# Altium PCB motor_dev_pcb.PcbDoc (part 1 of 2)
Units mm, origin at the board's own origin, x right, y up, seen from the top; angles counter-clockwise.
Board outline 133.34 x 70 mm, 2 copper layers (Top Layer, Bottom Layer); 214 components, 218 nets, 1073 pads, 147 vias.
Unrouted connection lines stored in the file: 690.
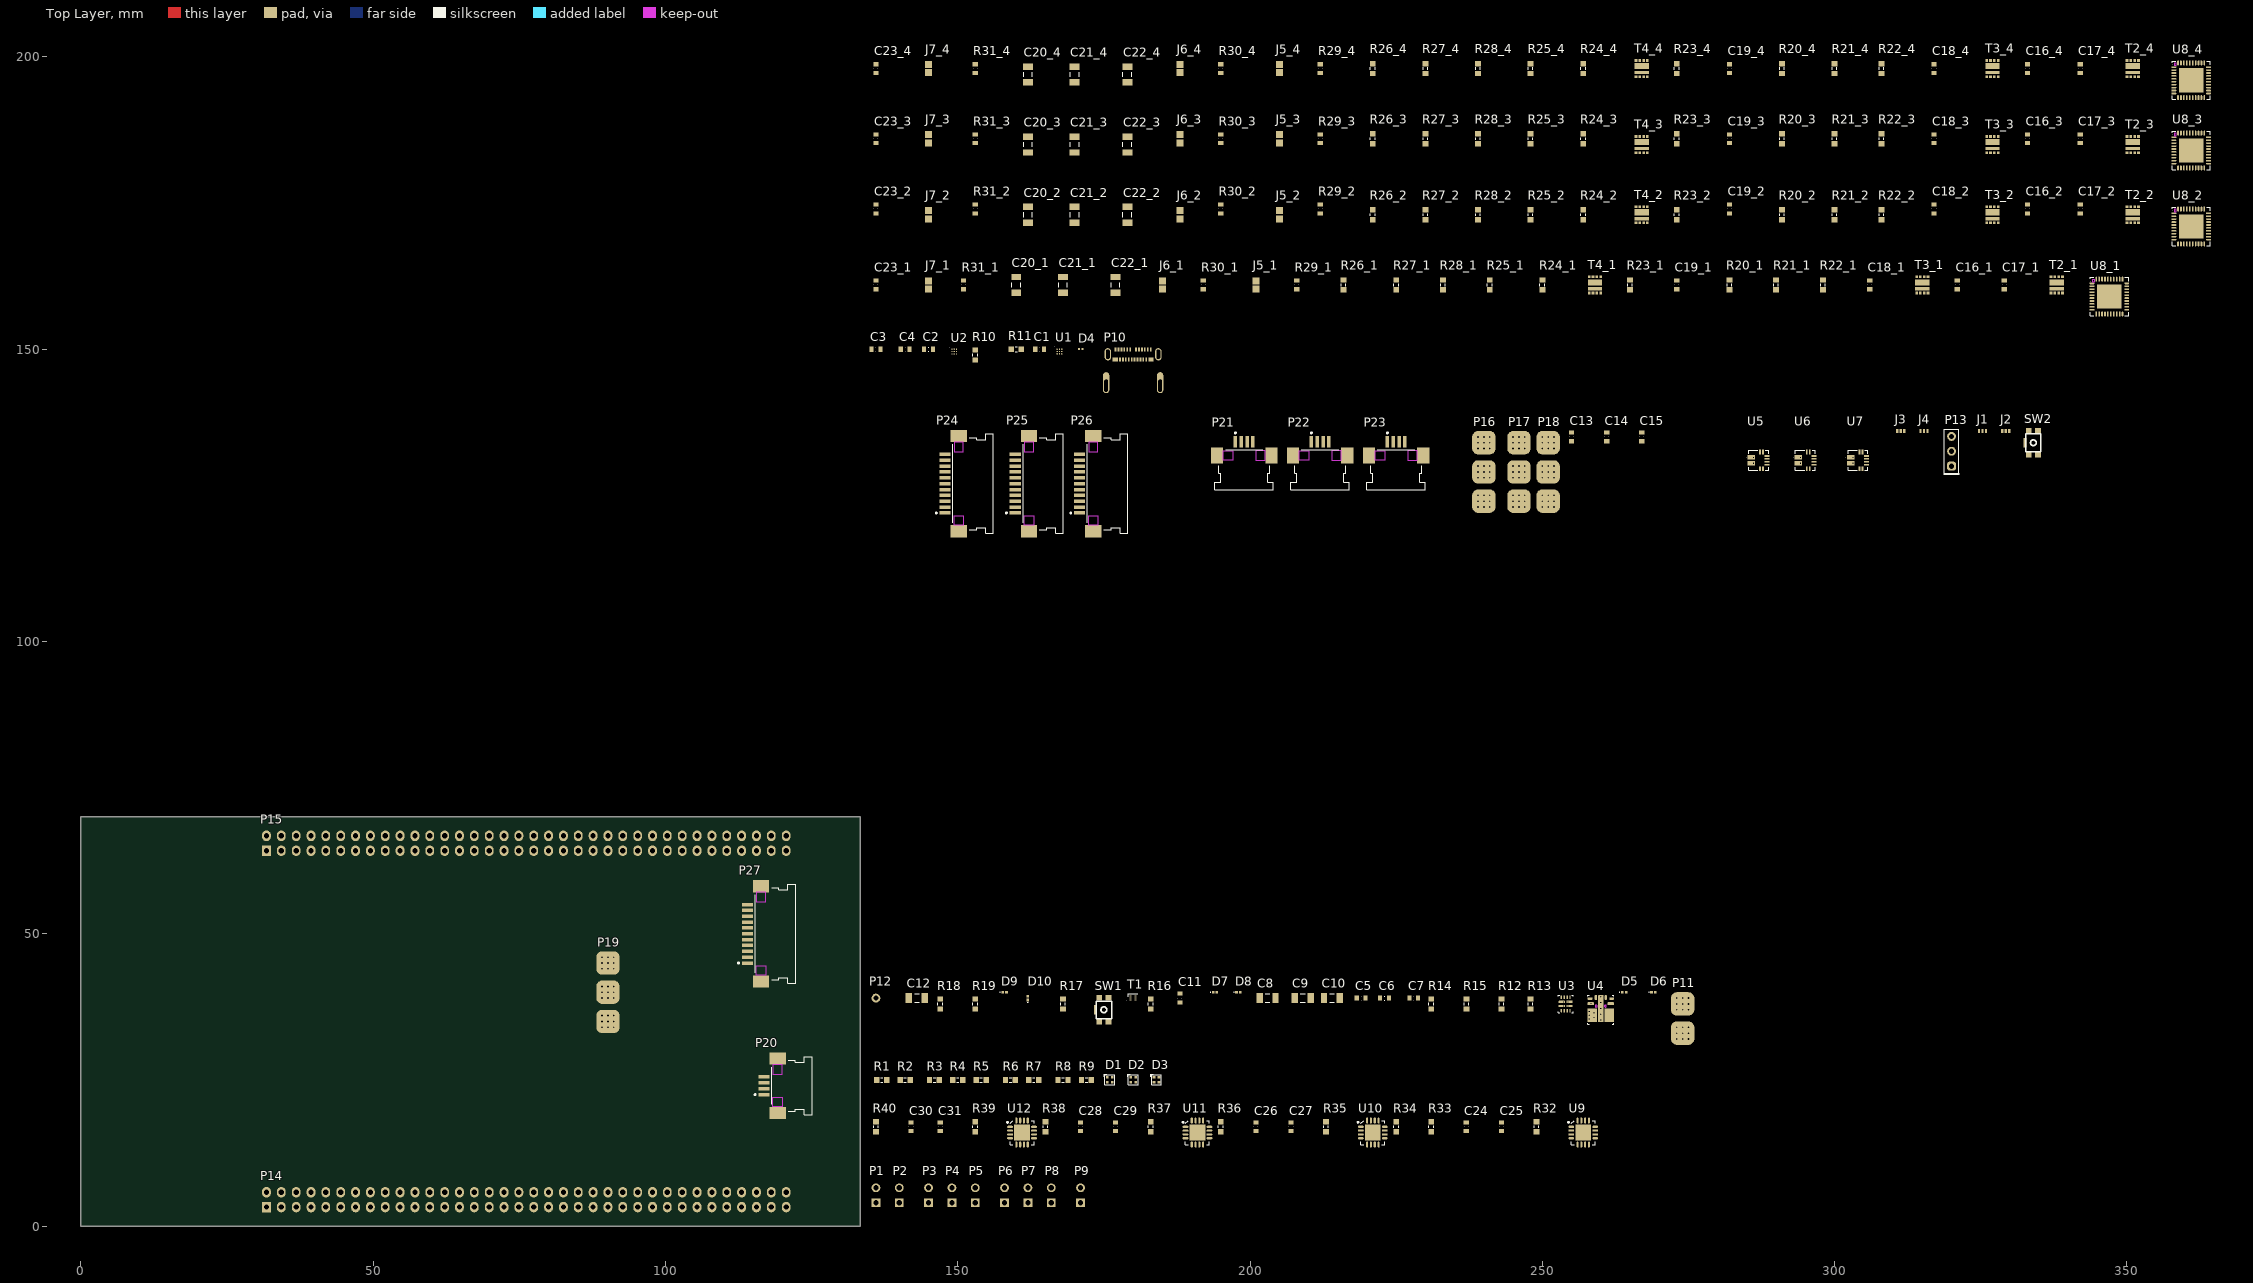
[diagram p0: Top Layer view]
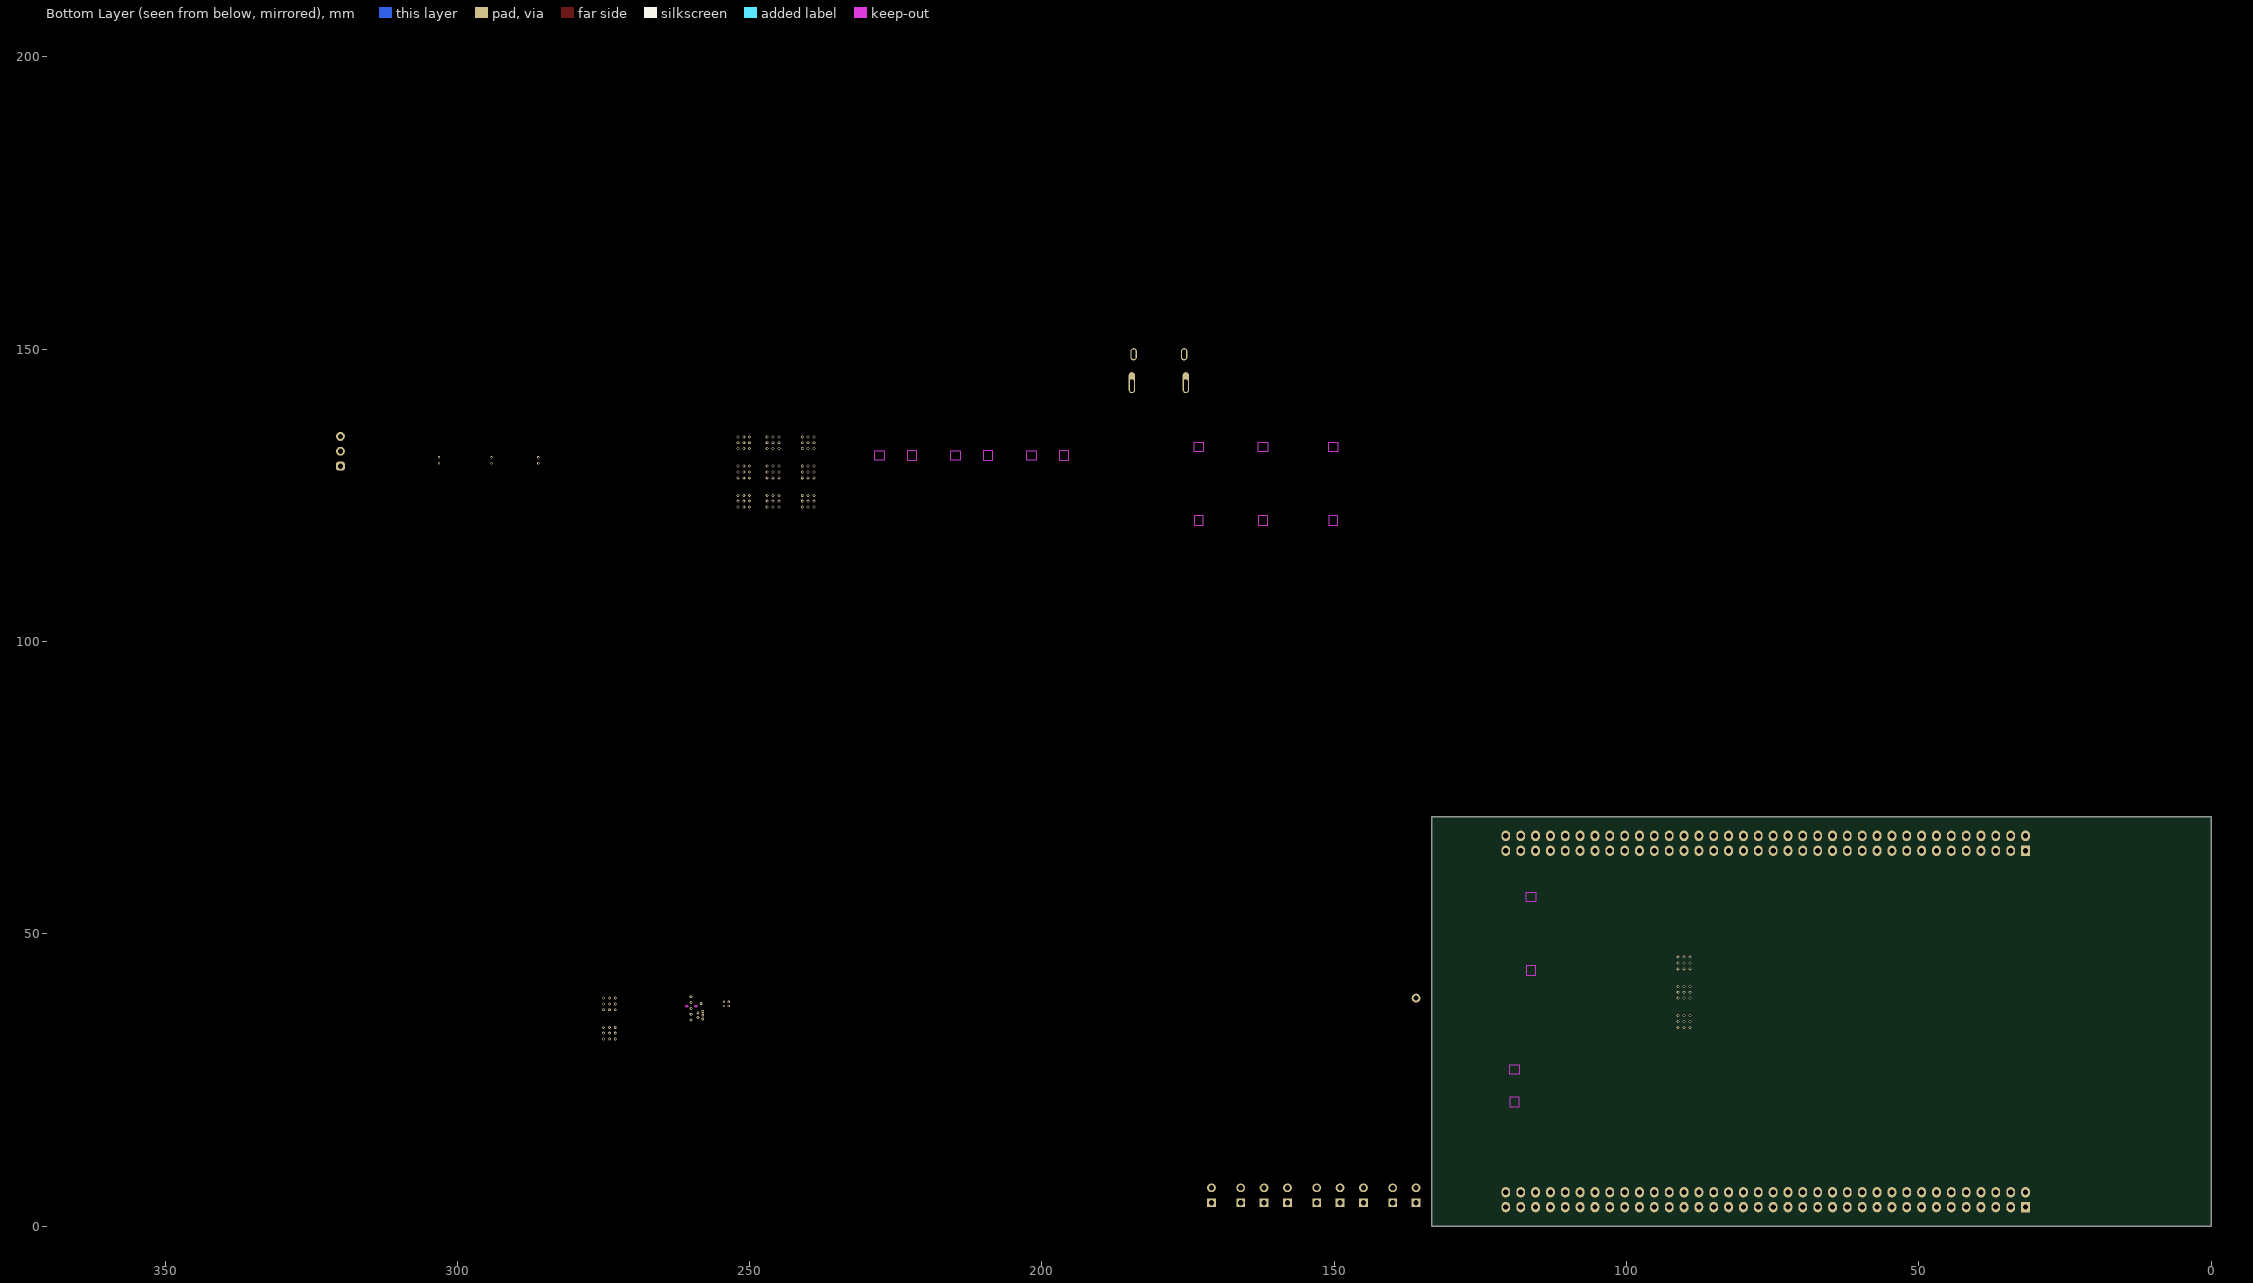
[diagram p1: Bottom Layer view, seen from below]

## Layer stack, top to bottom
Top Solder: solder mask 0.0102, Solder Resist, Dk 3.5
Top Layer: signal copper 0.0356
Dielectric1: dielectric 0.32, FR-4, Dk 4.8
Bottom Layer: signal copper 0.0356
Bottom Solder: solder mask 0.0102, Solder Resist, Dk 3.5

## Board outline
0,0 133.34,0 133.34,70 0,70

## Design rules (kind name [scope] priority, off if disabled: settings)
AcuteAngle [All] p1 off: minimum=8.80000000000000E+0001 checktracksonly=FALSE
BoardOutlineClearance [All] p1: gap=0.5 ignorepadtopadclearanceinfootprint=FALSE
Clearance Clearance_Normal [All] p1: gap=0.1 ignorepadtopadclearanceinfootprint=FALSE except(0.2: Via-Via Via-Fill Via-Poly Via-Region Via-Text Via-Hole)
ComponentClearance [All] p1: gap=0.2 collisioncheckmode=3 verticalgap=0.2 showdistances=FALSE
FabricationTestPointUsage TestPointUsage [All] p1: valid=0 allowmultiple=FALSE
FabricationTestpoint Testpoint [All] p1: side=3 testpointundercomponent=TRUE minsize=1.016 maxsize=2.54 preferedsize=1.524 minholesize=0 maxholesize=1.016 preferedholesize=0.813 testpointgrid=0.025 allowsidetop=TRUE allowsidebottom=TRUE usegrid=TRUE gridtolerance=0
Height [All] p1 off: minheight=0 maxheight=25.4 prefheight=12.7
HoleSize [All] p1: absolutevalues=TRUE maxlimit=0.4 minlimit=0.2 maxpercent=80.000 minpercent=20.000
HoleToHoleClearance [All] p1: gap=0.2 allowstackedmicrovias=TRUE
MinimumAnnularRing MinimumAnnularRingOuterLayer [OnLayer('Top Layer') Or OnLayer('Bottom Layer')] p1: minimumring=0.1
MinimumAnnularRing MinimumAnnularRingInnerLayer [(Not OnLayer('Top Layer')) Or (Not OnLayer('Bottom Layer'))] p2: minimumring=0.1
MinimumSolderMaskSliver [All] p1: minsoldermaskwidth=0.15
PlaneClearance [All] p1: clearance=0.4
PlaneConnect [All] p1: planeconnectstyle=Relief reliefexpansion=0.508 reliefentries=4 reliefconductorwidth=0.2 reliefairgap=0.254
PolygonConnect PolygonConnect_Via [IsVia] p1: connectstyle=Direct reliefconductorwidth=0.254 reliefentries=4 polygonreliefangle="90 Angle" airgapwidth=0.254
PolygonConnect [All] p2: connectstyle=Relief reliefconductorwidth=0.2 reliefentries=4 polygonreliefangle="90 Angle" airgapwidth=0.254
RoomDefinition U_USB [InComponentClass('U_USB')] p1 off: confinementstyle=ConfineIn formatcopy=TRUE lockcomponents=FALSE outline 134,141 186,141 186,154 134,154
RoomDefinition U_Programmer [InComponentClass('U_Programmer')] p2 off: confinementstyle=ConfineIn formatcopy=TRUE lockcomponents=FALSE outline 134,44 337,44 337,140 134,140
RoomDefinition U_Power [InComponentClass('U_Power')] p3 off: confinementstyle=ConfineIn formatcopy=TRUE lockcomponents=FALSE outline 134,30 277,30 277,44 134,44
RoomDefinition U_Leds [InComponentClass('U_Leds')] p4 off: confinementstyle=ConfineIn formatcopy=TRUE lockcomponents=FALSE outline 135,23 187,23 187,29 135,29
RoomDefinition U_Encoders [InComponentClass('U_Encoders')] p5 off: confinementstyle=ConfineIn formatcopy=TRUE lockcomponents=FALSE outline 135,13 260,13 260,22 135,22
RoomDefinition U4_ESC_2S-5S [InComponentClass('U4_ESC_2S-5S')] p6 off: confinementstyle=ConfineIn formatcopy=TRUE lockcomponents=FALSE outline 135,192 365,192 365,203 135,203
RoomDefinition U3_ESC_2S-5S [InComponentClass('U3_ESC_2S-5S')] p7 off: confinementstyle=ConfineIn formatcopy=TRUE lockcomponents=FALSE outline 135,180 365,180 365,191 135,191
RoomDefinition U2_ESC_2S-5S [InComponentClass('U2_ESC_2S-5S')] p8 off: confinementstyle=ConfineIn formatcopy=TRUE lockcomponents=FALSE outline 135,167 365,167 365,179 135,179
RoomDefinition U1_ESC_2S-5S [InComponentClass('U1_ESC_2S-5S')] p9 off: confinementstyle=ConfineIn formatcopy=TRUE lockcomponents=FALSE outline 135,155 351,155 351,166 135,166
RoutingCorners [All] p1: cornerstyle=45-Degree minsetback=1 maxsetback=2.54
RoutingVias [All] p1: holewidth=0.3 width=0.6 viastyle="Through Hole" minholewidth=0.2 minwidth=0.5 maxholewidth=1 maxwidth=4
SMDToCorner [All] p1 off: distance=78740
SMDToPlane [All] p1 off: distance=118110
SilkToSilkClearance [All] p1: silktosilkclearance=0.1
SilkToSolderMaskClearance SilkscreenOverComponentPads [IsPad] p1: minsilkscreentomaskgap=0.15 clearancetoexposedcopper=TRUE
SilkToSolderMaskClearance SilkscreenOverComponentPads_1 [IsPad] p2: minsilkscreentomaskgap=0.1 clearancetoexposedcopper=FALSE
SolderMaskExpansion [All] p1: expansion=0.075
ViasUnderSMD [All] p1: allowed=FALSE
Width [All] p1: maxlimit=5 minlimit=0.1 preferedwidth=0.2 minimp=50.000000 maximp=50.000000 favimp=50.000000
18 further rules are at their usual default settings.

## Classes and differential pairs
channel class ESC_2S-5S: U1_ESC_2S-5S U2_ESC_2S-5S U3_ESC_2S-5S U4_ESC_2S-5S
component class U_USB: C1 C2 C3 C4 D4 P10 R10 R11 U1 U2
component class U_Programmer: C13 C14 C15 J1 J2 J3 J4 P13 P14 P15 P16 P17 P18 P19 P20 P21 P22 P23 P24 P25 P26 P27 SW2 U5 U6 U7
component class U_Power: C5 C6 C7 C8 C9 C10 C11 C12 D5 D6 D7 D8 D9 D10 P11 P12 R12 R13 R14 R15 R16 R17 R18 R19 SW1 T1 U3 U4
component class U_Leds: D1 D2 D3 R1 R2 R3 R4 R5 R6 R7 R8 R9
component class U_Encoders: C24 C25 C26 C27 C28 C29 C30 C31 R32 R33 R34 R35 R36 R37 R38 R39 R40 U9 U10 U11 U12
component class U4_ESC_2S-5S: C16_4 C17_4 C18_4 C19_4 C20_4 C21_4 C22_4 C23_4 J5_4 J6_4 J7_4 R20_4 R21_4 R22_4 R23_4 R24_4 R25_4 R26_4 R27_4 R28_4 R29_4 R30_4 R31_4 T2_4 T3_4 T4_4 U8_4
component class U3_ESC_2S-5S: C16_3 C17_3 C18_3 C19_3 C20_3 C21_3 C22_3 C23_3 J5_3 J6_3 J7_3 R20_3 R21_3 R22_3 R23_3 R24_3 R25_3 R26_3 R27_3 R28_3 R29_3 R30_3 R31_3 T2_3 T3_3 T4_3 U8_3
component class U2_ESC_2S-5S: C16_2 C17_2 C18_2 C19_2 C20_2 C21_2 C22_2 C23_2 J5_2 J6_2 J7_2 R20_2 R21_2 R22_2 R23_2 R24_2 R25_2 R26_2 R27_2 R28_2 R29_2 R30_2 R31_2 T2_2 T3_2 T4_2 U8_2
component class U1_ESC_2S-5S: C16_1 C17_1 C18_1 C19_1 C20_1 C21_1 C22_1 C23_1 J5_1 J6_1 J7_1 R20_1 R21_1 R22_1 R23_1 R24_1 R25_1 R26_1 R27_1 R28_1 R29_1 R30_1 R31_1 T2_1 T3_1 T4_1 U8_1

## Components (designator, comment, footprint, x,y, rotation, side; value= is the part's Value field where it differs from the comment)
C1 "100nF 50V X7R" CAPC1608X08L 164,150 r0 top
C2 "100nF" CAPC1608X08L 145,150 r0 top
C3 "470pF" CAPC1608X08L 136,150 r0 top
C4 "470pF" CAPC1608X08L 141,150 r0 top
C5 "100pF" CAPC1608X08L 219,39 r0 top
C6 "47uF" CAPC1608X08L 223,39 r0 top
C7 "47uF" CAPC1608X08L 228,39 r0 top
C8 "22uF 35V" CAPC3216X17L 203,39 r0 top
C9 "22uF 35V" CAPC3216X17L 209,39 r0 top
C10 "22uF 35V" CAPC3216X17L 214,39 r0 top
C11 "100nF" CAPC1608X08L 188,39 r90 top
C12 "22uF 35V" CAPC3216X17L 143,39 r0 top
C13 "100nF" CAPC1608X08L 255,135 r90 top
C14 "100nF" CAPC1608X08L 261,135 r90 top
C15 "100nF" CAPC1608X08L 267,135 r90 top
C16_1 "100nF 35V X5R" CAPC1608X08L 321,161 r90 top (schematic designator C16)
C16_2 "100nF 35V X5R" CAPC1608X08L 333,174 r90 top (schematic designator C16)
C16_3 "100nF 35V X5R" CAPC1608X08L 333,186 r90 top (schematic designator C16)
C16_4 "100nF 35V X5R" CAPC1608X08L 333,198 r90 top (schematic designator C16)
C17_1 "1uF 16V X5R" CAPC1608X08L 329,161 r90 top (schematic designator C17)
C17_2 "1uF 16V X5R" CAPC1608X08L 342,174 r90 top (schematic designator C17)
C17_3 "1uF 16V X5R" CAPC1608X08L 342,186 r90 top (schematic designator C17)
C17_4 "1uF 16V X5R" CAPC1608X08L 342,198 r90 top (schematic designator C17)
C18_1 "47nF 35V X5R" CAPC1608X08L 306,161 r90 top (schematic designator C18)
C18_2 "47nF 35V X5R" CAPC1608X08L 317,174 r90 top (schematic designator C18)
C18_3 "47nF 35V X5R" CAPC1608X08L 317,186 r90 top (schematic designator C18)
C18_4 "47nF 35V X5R" CAPC1608X08L 317,198 r90 top (schematic designator C18)
C19_1 "1uF 6.3V X5R" CAPC1608X08L 273,161 r90 top (schematic designator C19)
C19_2 "1uF 6.3V X5R" CAPC1608X08L 282,174 r90 top (schematic designator C19)
C19_3 "1uF 6.3V X5R" CAPC1608X08L 282,186 r90 top (schematic designator C19)
C19_4 "1uF 6.3V X5R" CAPC1608X08L 282,198 r90 top (schematic designator C19)
C20_1 "22uF 35V" CAPC3216X17L 160,161 r90 top (schematic designator C20)
C20_2 "22uF 35V" CAPC3216X17L 162,173 r90 top (schematic designator C20)
C20_3 "22uF 35V" CAPC3216X17L 162,185 r90 top (schematic designator C20)
C20_4 "22uF 35V" CAPC3216X17L 162,197 r90 top (schematic designator C20)
C21_1 "22uF 35V" CAPC3216X17L 168,161 r90 top (schematic designator C21)
C21_2 "22uF 35V" CAPC3216X17L 170,173 r90 top (schematic designator C21)
C21_3 "22uF 35V" CAPC3216X17L 170,185 r90 top (schematic designator C21)
C21_4 "22uF 35V" CAPC3216X17L 170,197 r90 top (schematic designator C21)
C22_1 "22uF 35V" CAPC3216X17L 177,161 r90 top (schematic designator C22)
C22_2 "22uF 35V" CAPC3216X17L 179,173 r90 top (schematic designator C22)
C22_3 "22uF 35V" CAPC3216X17L 179,185 r90 top (schematic designator C22)
C22_4 "22uF 35V" CAPC3216X17L 179,197 r90 top (schematic designator C22)
C23_1 "100nF 6.3V X5R" CAPC1608X08L 136,161 r90 top (schematic designator C23)
C23_2 "100nF 6.3V X5R" CAPC1608X08L 136,174 r90 top (schematic designator C23)
C23_3 "100nF 6.3V X5R" CAPC1608X08L 136,186 r90 top (schematic designator C23)
C23_4 "100nF 6.3V X5R" CAPC1608X08L 136,198 r90 top (schematic designator C23)
C24 "4.7uF" CAPC1608X08L 237,17 r90 top
C25 "100nF" CAPC1608X08L 243,17 r90 top
C26 "4.7uF" CAPC1608X08L 201,17 r90 top
C27 "100nF" CAPC1608X08L 207,17 r90 top
C28 "4.7uF" CAPC1608X08L 171,17 r90 top
C29 "100nF" CAPC1608X08L 177,17 r90 top
C30 "4.7uF" CAPC1608X08L 142,17 r90 top
C31 "100nF" CAPC1608X08L 147,17 r90 top
D1 "SML-LX0404SIUPGUSB" LUMEX_SML-LX0404SIUPGUSB 176,25 r0 top
D2 "SML-LX0404SIUPGUSB" LUMEX_SML-LX0404SIUPGUSB 180,25 r0 top
D3 "SML-LX0404SIUPGUSB" LUMEX_SML-LX0404SIUPGUSB 184,25 r0 top
D4 "ESDL20-1BF4" "0201 USB protection diodes" 171,150 r0 top
D5 "RB751S-40DP-TP" "0201 diode - Wide" 264,40 r0 top
D6 "RB751S-40DP-TP" "0201 diode - Wide" 269,40 r0 top
D7 "RB751S-40DP-TP" "0201 diode - Wide" 194,40 r0 top
D8 "RB751S-40DP-TP" "0201 diode - Wide" 198,40 r0 top
D9 "GDZ5V1LP3-7" "0201 diode - Wide" 158,40 r0 top
D10 "GDZ5V1LP3-7" "0201 diode - Wide" 162,39 r90 top
J1 "CC_SolderJP3_Micro" CC_SolderJP3_U 325,136 r0 top
J2 "CC_SolderJP3_Micro" CC_SolderJP3_U 329,136 r0 top
J3 "CC_SolderJP3_Micro" CC_SolderJP3_U 311,136 r0 top
J4 "CC_SolderJP3_Micro" CC_SolderJP3_U 315,136 r0 top
J5_1 "CC_SolderJP2_Medium" CC_SolderJP_M 201,161 r90 top (schematic designator J5)
J5_2 "CC_SolderJP2_Medium" CC_SolderJP_M 205,173 r90 top (schematic designator J5)
J5_3 "CC_SolderJP2_Medium" CC_SolderJP_M 205,186 r90 top (schematic designator J5)
J5_4 "CC_SolderJP2_Medium" CC_SolderJP_M 205,198 r90 top (schematic designator J5)
J6_1 "CC_SolderJP2_Medium" CC_SolderJP_M 185,161 r90 top (schematic designator J6)
J6_2 "CC_SolderJP2_Medium" CC_SolderJP_M 188,173 r90 top (schematic designator J6)
J6_3 "CC_SolderJP2_Medium" CC_SolderJP_M 188,186 r90 top (schematic designator J6)
J6_4 "CC_SolderJP2_Medium" CC_SolderJP_M 188,198 r90 top (schematic designator J6)
J7_1 "CC_SolderJP2_Medium" CC_SolderJP_M 145,161 r90 top (schematic designator J7)
J7_2 "CC_SolderJP2_Medium" CC_SolderJP_M 145,173 r90 top (schematic designator J7)
J7_3 "CC_SolderJP2_Medium" CC_SolderJP_M 145,186 r90 top (schematic designator J7)
J7_4 "CC_SolderJP2_Medium" CC_SolderJP_M 145,198 r90 top (schematic designator J7)
P1 "Header 2 flat" HEADER1x2-2.54 136,4 r90 top
P2 "Header 2 flat" HEADER1x2-2.54 140,4 r90 top
P3 "Header 2 flat" HEADER1x2-2.54 145,4 r90 top
P4 "Header 2 flat" HEADER1x2-2.54 149,4 r90 top
P5 "Header 2 flat" HEADER1x2-2.54 153,4 r90 top
P6 "Header 2 flat" HEADER1x2-2.54 158,4 r90 top
P7 "Header 2 flat" HEADER1x2-2.54 162,4 r90 top
P8 "Header 2 flat" HEADER1x2-2.54 166,4 r90 top
P9 "Header 2 flat" HEADER1x2-2.54 171,4 r90 top
P10 "201267-0005" MOLEX_2012670005 180,142 r0 top
P11 "2 power pads" "PowerPads 2 pins" 274,33 r90 top
P12 "Header 1" HEADER1x1-2.54 136,39 r0 top
P13 "Header 3" HEADER1X3-2.54 320,130 r90 top
P14 "Header 2x36" HEADER2x36-2.54 31.74,3.25 r0 top
P15 "Header 2x36" HEADER2x36-2.54 31.74,64.21 r0 top
P16 "3 power pads" "PowerPads 3 pins" 240,124 r90 top
P17 "3 power pads" "PowerPads 3 pins" 246,124 r90 top
P18 "3 power pads" "PowerPads 3 pins" 251,124 r90 top
P19 "3 power pads" "PowerPads 3 pins" 90.16,35 r90 top
P20 "MOLEX-52207-0433" "Molex 52207-0433" 118,24 r90 top
P21 "MOLEX-52207-0433" "Molex 52207-0433" 199,133 r0 top
P22 "MOLEX-52207-0433" "Molex 52207-0433" 212,133 r0 top
P23 "MOLEX-52207-0433" "Molex 52207-0433" 225,133 r0 top
P24 "MOLEX-52207-1133" "Molex 52207-1133" 149,127 r90 top
P25 "MOLEX-52207-1133" "Molex 52207-1133" 161,127 r90 top
P26 "MOLEX-52207-1133" "Molex 52207-1133" 172,127 r90 top
P27 "MOLEX-52207-1133" "Molex 52207-1133" 115.175,50 r90 top
R1 "1K5" RESC1608X06N 137,25 r0 top
R2 "560R" RESC1608X06N 141,25 r0 top
R3 "680R" RESC1608X06N 146,25 r0 top
R4 "1K5" RESC1608X06N 150,25 r0 top
R5 "560R" RESC1608X06N 154,25 r0 top
R6 "680R" RESC1608X06N 159,25 r0 top
R7 "1K5" RESC1608X06N 163,25 r0 top
R8 "560R" RESC1608X06N 168,25 r0 top
R9 "680R" RESC1608X06N 172,25 r0 top
R10 "4.7K" RESC1608X06N 153,149 r90 top
R11 "4.7K" RESC1608X06N 160,150 r0 top
R12 "1M" RESC1608X06N 243,38 r90 top
R13 "1M" RESC1608X06N 248,38 r90 top
R14 "20K" RESC1608X06N 231,38 r90 top
R15 "10K 1%" RESC1608X06N 237,38 r90 top
R16 "2K21 1%" RESC1608X06N 183,38 r90 top
R17 "21K5" RESC1608X06N 168,38 r90 top
R18 "100K" RESC1608X06N 147,38 r90 top
R19 "100K" RESC1608X06N 153,38 r90 top
R20_1 "10K" RESC1608X06N 282,161 r90 top (schematic designator R20)
R20_2 "10K" RESC1608X06N 291,173 r90 top (schematic designator R20)
R20_3 "10K" RESC1608X06N 291,186 r90 top (schematic designator R20)
R20_4 "10K" RESC1608X06N 291,198 r90 top (schematic designator R20)
R21_1 "10K" RESC1608X06N 290,161 r90 top (schematic designator R21)
R21_2 "10K" RESC1608X06N 300,173 r90 top (schematic designator R21)
R21_3 "10K" RESC1608X06N 300,186 r90 top (schematic designator R21)
R21_4 "10K" RESC1608X06N 300,198 r90 top (schematic designator R21)
R22_1 "10K" RESC1608X06N 298,161 r90 top (schematic designator R22)
R22_2 "10K" RESC1608X06N 308,173 r90 top (schematic designator R22)
R22_3 "10K" RESC1608X06N 308,186 r90 top (schematic designator R22)
R22_4 "10K" RESC1608X06N 308,198 r90 top (schematic designator R22)
R23_1 "10K" RESC1608X06N 265,161 r90 top (schematic designator R23)
R23_2 "10K" RESC1608X06N 273,173 r90 top (schematic designator R23)
R23_3 "10K" RESC1608X06N 273,186 r90 top (schematic designator R23)
R23_4 "10K" RESC1608X06N 273,198 r90 top (schematic designator R23)
R24_1 "10K" RESC1608X06N 250,161 r90 top (schematic designator R24)
R24_2 "10K" RESC1608X06N 257,173 r90 top (schematic designator R24)
R24_3 "10K" RESC1608X06N 257,186 r90 top (schematic designator R24)
R24_4 "10K" RESC1608X06N 257,198 r90 top (schematic designator R24)
R25_1 "10K" RESC1608X06N 241,161 r90 top (schematic designator R25)
R25_2 "10K" RESC1608X06N 248,173 r90 top (schematic designator R25)
R25_3 "10K" RESC1608X06N 248,186 r90 top (schematic designator R25)
R25_4 "10K" RESC1608X06N 248,198 r90 top (schematic designator R25)
R26_1 "2K2" RESC1608X06N 216,161 r90 top (schematic designator R26)
R26_2 "2K2" RESC1608X06N 221,173 r90 top (schematic designator R26)
R26_3 "2K2" RESC1608X06N 221,186 r90 top (schematic designator R26)
R26_4 "2K2" RESC1608X06N 221,198 r90 top (schematic designator R26)
R27_1 "2K2" RESC1608X06N 225,161 r90 top (schematic designator R27)
R27_2 "2K2" RESC1608X06N 230,173 r90 top (schematic designator R27)
R27_3 "2K2" RESC1608X06N 230,186 r90 top (schematic designator R27)
R27_4 "2K2" RESC1608X06N 230,198 r90 top (schematic designator R27)
R28_1 "2K2" RESC1608X06N 233,161 r90 top (schematic designator R28)
R28_2 "2K2" RESC1608X06N 239,173 r90 top (schematic designator R28)
R28_3 "2K2" RESC1608X06N 239,186 r90 top (schematic designator R28)
R28_4 "2K2" RESC1608X06N 239,198 r90 top (schematic designator R28)
R29_1 "1m wide 0805 1W" RESC1608X06L 208,161 r90 top (schematic designator R29)
R29_2 "1m wide 0805 1W" RESC1608X06L 212,174 r90 top (schematic designator R29)
R29_3 "1m wide 0805 1W" RESC1608X06L 212,186 r90 top (schematic designator R29)
R29_4 "1m wide 0805 1W" RESC1608X06L 212,198 r90 top (schematic designator R29)
R30_1 "1m wide 0805 1W" RESC1608X06L 192,161 r90 top (schematic designator R30)
R30_2 "1m wide 0805 1W" RESC1608X06L 195,174 r90 top (schematic designator R30)
R30_3 "1m wide 0805 1W" RESC1608X06L 195,186 r90 top (schematic designator R30)
R30_4 "1m wide 0805 1W" RESC1608X06L 195,198 r90 top (schematic designator R30)
R31_1 "1m wide 0805 1W" RESC1608X06L 151,161 r90 top (schematic designator R31)
R31_2 "1m wide 0805 1W" RESC1608X06L 153,174 r90 top (schematic designator R31)
R31_3 "1m wide 0805 1W" RESC1608X06L 153,186 r90 top (schematic designator R31)
R31_4 "1m wide 0805 1W" RESC1608X06L 153,198 r90 top (schematic designator R31)
R32 "15R 200mW" RESC1608X06N 249,17 r90 top
R33 "47K" RESC1608X06N 231,17 r90 top
R34 "100K" RESC1608X06N 225,17 r90 top
R35 "15R 200mW" RESC1608X06N 213,17 r90 top
R36 "47K" RESC1608X06N 195,17 r90 top
R37 "15R 200mW" RESC1608X06N 183,17 r90 top
R38 "47K" RESC1608X06N 165,17 r90 top
R39 "15R 200mW" RESC1608X06N 153,17 r90 top
R40 "47K" RESC1608X06N 136,17 r90 top
SW1 "button" C&K_KMR2 175,37 r0 top
SW2 "button" C&K_KMR2 334,134 r0 top
T1 "PMDXB550UNEZ" DFN1010B-6 180,39 r0 top
T2_1 "SIZ322DT-T1-GE3" "PowerPair 3x3" 338,161 r0 top (schematic designator T2)
T2_2 "SIZ322DT-T1-GE3" "PowerPair 3x3" 351,173 r0 top (schematic designator T2)
T2_3 "SIZ322DT-T1-GE3" "PowerPair 3x3" 351,185 r0 top (schematic designator T2)
T2_4 "SIZ322DT-T1-GE3" "PowerPair 3x3" 351,198 r0 top (schematic designator T2)
T3_1 "SIZ322DT-T1-GE3" "PowerPair 3x3" 315,161 r0 top (schematic designator T3)
T3_2 "SIZ322DT-T1-GE3" "PowerPair 3x3" 327,173 r0 top (schematic designator T3)
T3_3 "SIZ322DT-T1-GE3" "PowerPair 3x3" 327,185 r0 top (schematic designator T3)
T3_4 "SIZ322DT-T1-GE3" "PowerPair 3x3" 327,198 r0 top (schematic designator T3)
T4_1 "SIZ322DT-T1-GE3" "PowerPair 3x3" 259,161 r0 top (schematic designator T4)
T4_2 "SIZ322DT-T1-GE3" "PowerPair 3x3" 267,173 r0 top (schematic designator T4)
T4_3 "SIZ322DT-T1-GE3" "PowerPair 3x3" 267,185 r0 top (schematic designator T4)
T4_4 "SIZ322DT-T1-GE3" "PowerPair 3x3" 267,198 r0 top (schematic designator T4)
U1 "TPD2S300YFFR" "WLCSP9 - ti" 167,150 r0 top
U2 "FUSB302UCX" WLCSP9 149,150 r0 top
U3 "TPS2121RUXR" "VQFN-HR (RUX) 12" 254,38 r0 top value=Value
U4 "TPSM84209RKHT" "QFN-FCMOD (RKH) 9" 260,37 r0 top
U5 "ACS711KEXLT-31AB-T" 12-PowerWFQFN 287,131 r0 top
U6 "ACS711KEXLT-31AB-T" 12-PowerWFQFN 295,131 r0 top
U7 "ACS711KEXLT-31AB-T" 12-PowerWFQFN 304,131 r0 top
U8_1 "DRV8323SRTAx" RTA0040B_NV 347,159 r0 top value=Value (schematic designator U8)
U8_2 "DRV8323SRTAx" RTA0040B_NV 361,171 r0 top value=Value (schematic designator U8)
U8_3 "DRV8323SRTAx" RTA0040B_NV 361,184 r0 top value=Value (schematic designator U8)
U8_4 "DRV8323SRTAx" RTA0040B_NV 361,196 r0 top value=Value (schematic designator U8)
U9 "AS5055A-BQFM" "QFN4X4-16 - EPAD unconnected" 257,16 r0 top
U10 "AS5055A-BQFM" "QFN4X4-16 - EPAD unconnected" 221,16 r0 top
U11 "AS5055A-BQFM" "QFN4X4-16 - EPAD unconnected" 191,16 r0 top
U12 "AS5055A-BQFM" "QFN4X4-16 - EPAD unconnected" 161,16 r0 top

## Footprints (in the part's own frame and the unit in brackets; to place one, negate y for a bottom-side part, rotate by r counter-clockwise, add the part's x,y. Pads: shape width x height; smd on the part's side, far side on the other; paste and mask are expansions set on the pad)
12-PowerWFQFN [mm]
  rect 1.3x0.8 smd mask+0.05: 1(-1.25,0.5) 4(-1.25,-0.5)
  rect 0.5x0.3 smd paste-0.5 mask+0.05: 1(-1.25,0.682) 2(-1.25,0.301) 3(-1.25,-0.318) 4(-1.25,-0.699)
  rect 0.3x0.85 smd mask+0.05: 5(0.25,-1.45) 6(0.75,-1.45) 11(0.75,1.45) 12(0.25,1.45)
  rect 0.85x0.3 smd mask+0.05: 7(1.45,-0.75) 8(1.45,-0.25) 9(1.45,0.25) 10(1.45,0.75)
  silkscreen extent -2.1,-1.71 1.7,1.71, body extent -1.5,-1.5 4.95,5.18, height 0.74
"0201 diode - Wide" [mm] "for 0201 mcsemi diode"
  rect 0.45x0.45 smd mask+0.05: 1(-0.325,0) 2(0.325,0)
  silkscreen extent -0.72,-0.07 -0.72,0.08, body extent -0.34,-0.19 1.33,0.2, height 0.34
"0201 USB protection diodes" [mm] "USB PROTECTION ST"
  rect 0.35x0.35 smd: 1(-0.3,0) 2(0.3,0)
  body extent -0.31,-0.16 0.31,0.16, height 0.3
C&K_KMR2 [mm]
  rect 1x0.9 smd: 1(-0.8,2.05) 1(-0.8,-2.05) 2(0.8,2.05) 2(0.8,-2.05)
  rect 0.55x1.7 smd: Shield(-1.425,0)
  silkscreen extent -1.3,-1.5 1.3,1.5, body extent -1.4,-2.3 1.4,2.3, height 1.9
CAPC1608X08L [mm] "Chip Capacitor, Body 1.6x0.8mm, IPC High Density, EIA 0603"
  rect 0.7x0.9 smd: 1(-0.75,0) 2(0.75,0)
  silkscreen extent -0.01,-0.35 0.01,0.35, body extent -0.9,-0.48 0.9,0.48, height 0.95
CAPC3216X17L [mm] "Chip Capacitor, Body 3.2x1.6mm, IPC High Density, EIA 1206"
  rect 1.1x1.7 smd: 1(-1.35,0) 2(1.35,0)
  silkscreen extent -0.4,-0.75 0.4,0.75, body extent -1.7,-0.9 1.7,0.9, height 1.9
CC_SolderJP3_U [mm] "Micro Solder Jumper 3 leads"
  rect 0.4x0.65 smd paste-0.6 mask+0.05: 1(-0.3,0) 2(0.3,0) 3(0.9,0)
  body extent -0.45,-0.27 1.05,0.28, height 0.3
CC_SolderJP_M [mm] "Medium Solder Jumper 2 leads"
  rect 1.2x1.2 smd paste-0.6 mask+0.05: 1(-0.7,0) 2(0.7,0)
  body extent -1.25,-0.55 1.25,0.55, height 0.4
DFN1010B-6 [mm]
  rect 0.35x0.2 smd paste+0 mask+0.05: 1(-0.425,0.35) 2(-0.425,0) 3(-0.425,-0.35) 4(0.425,-0.35) 5(0.425,0) 6(0.425,0.35)
  silkscreen extent -1.13,-0.43 0.82,0.77, body extent -0.53,-0.57 0.52,0.58, height 0.4
HEADER1x1-2.54 [mm]
  round 1.5 hole 0.9: 1(0,0)
HEADER1x2-2.54 [mm]
  rect 1.5x1.5 hole 0.9: 1(0,0)
  round 1.5 hole 0.9: 2(2.54,0)
HEADER1X3-2.54 [mm]
  rrect50% 1.5x1.5 hole 0.9: 1(0,0)
  round 1.5 hole 0.9: 2(2.54,0) 3(5.08,0)
  silkscreen extent -1.55,-1.38 6.35,1.38
HEADER2x36-2.54 [mm] "Connector; Header; 50 Positions"
  rect 1.5x1.8 hole 0.9: 1(0,0)
  oval 1.5x1.8 hole 0.9: 2(0,2.54) 3(2.54,0) 4(2.54,2.54) 5(5.08,0) 6(5.08,2.54) 7(7.62,0) 8(7.62,2.54) 9(10.16,0) 10(10.16,2.54) 11(12.7,0) 12(12.7,2.54) 13(15.24,0) 14(15.24,2.54) 15(17.78,0) 16(17.78,2.54) 17(20.32,0) 18(20.32,2.54) 19(22.86,0) 20(22.86,2.54) 21(25.4,0) 22(25.4,2.54) 23(27.94,0) 24(27.94,2.54) 25(30.48,0) 26(30.48,2.54) 27(33.02,0) 28(33.02,2.54) 29(35.56,0) 30(35.56,2.54) 31(38.1,0) 32(38.1,2.54) 33(40.64,0) 34(40.64,2.54) 35(43.18,0) 36(43.18,2.54) 37(45.72,0) 38(45.72,2.54) 39(48.26,0) 40(48.26,2.54) 41(50.8,0) 42(50.8,2.54) 43(53.34,0) 44(53.34,2.54) 45(55.88,0) 46(55.88,2.54) 47(58.42,0) 48(58.42,2.54) 49(60.96,0) 50(60.96,2.54) 51(63.5,0) 52(63.5,2.54) 53(66.04,0) 54(66.04,2.54) 55(68.58,0) 56(68.58,2.54) 57(71.12,0) 58(71.12,2.54) 59(73.66,0) 60(73.66,2.54) 61(76.2,0) 62(76.2,2.54) 63(78.74,0) 64(78.74,2.54) 65(81.28,0) 66(81.28,2.54) 67(83.82,0) 68(83.82,2.54) 69(86.36,0) 70(86.36,2.54) 71(88.9,0) 72(88.9,2.54)
LUMEX_SML-LX0404SIUPGUSB [mm]
  rect 0.45x0.45 smd mask+0.05: 1(-0.425,0.425) 2(0.425,0.425) 3(0.425,-0.425) 4(-0.425,-0.425)
  silkscreen extent -0.95,-0.85 0.85,0.95, body extent -0.5,-0.5 0.5,0.5, height 0.3
"Molex 52207-0433" [mm]
  rect 0.6x1.9 smd: 1(-1.5,1.175) 2(-0.5,1.175) 3(0.5,1.175) 4(1.5,1.175)
  rect 2.1x2.8 smd: SHIELD(-4.65,-1.175) SHIELD(4.65,-1.175)
  Keep-Out Layer region: 3.6,-0.375 1.95,-0.375 1.95,-1.975 3.6,-1.975
  Keep-Out Layer region: -3.6,-0.375 -1.95,-0.375 -1.95,-1.975 -3.6,-1.975
  silkscreen extent -5,-7.07 5,2.8, body extent -5.15,-7.07 5.15,1.83, height 2.71
"Molex 52207-1133" [mm]
  rect 0.6x1.9 smd: 1(-5,1.175) 2(-4,1.175) 3(-3,1.175) 4(-2,1.175) 5(-1,1.175) 6(0,1.175) 7(1,1.175) 8(2,1.175) 9(3,1.175) 10(4,1.175) 11(5,1.175)
  rect 2.1x2.8 smd: SHIELD(-8.15,-1.175) SHIELD(8.15,-1.175)
  Keep-Out Layer region: -7.1,-0.375 -5.45,-0.375 -5.45,-1.975 -7.1,-1.975
  Keep-Out Layer region: 7.1,-0.375 5.45,-0.375 5.45,-1.975 7.1,-1.975
  silkscreen extent -8.5,-7.07 8.5,2.8, body extent -8.65,-7.07 8.65,1.83, height 2.71
MOLEX_2012670005 [mm]
  rect 0.3x0.7 smd: A1(-3.005,7.94) A2(-2.505,7.94) A3(-2.005,7.94) A4(-1.505,7.94) A5(-1.005,7.94) A6(-0.505,7.94) A7(0.495,7.94) A8(0.995,7.94) A9(1.495,7.94) A10(1.995,7.94) A11(2.495,7.94) A12(2.995,7.94) B2(2.245,6.24) B3(1.745,6.24) B4(1.245,6.24) B5(0.745,6.24) B6(0.245,6.24) B7(-0.255,6.24) B8(-0.755,6.24) B9(-1.255,6.24) B10(-1.755,6.24) B11(-2.255,6.24)
  rect 0.9x0.7 smd: B1(3.045,6.24) B12(-3.055,6.24)
  oval 1.1x3.6 hole 0.6 slot 2.1 at 90 deg copper offset 0,0.5: SHIELD(-4.625,1.77) SHIELD(4.615,1.77)
  oval 1.1x2.1 hole 0.6 slot 1.6 at 90 deg: SHIELD(-4.325,7.13) SHIELD(4.315,7.13)
  body extent -4.69,-0.18 4.69,8.12, height 3.69
"PowerPads 2 pins" [mm]
  rrect50% 4x4 smd paste-10: 1(0,0) 2(5,0)
"PowerPads 3 pins" [mm]
  rrect50% 4x4 smd paste-10: 1(0,0) 2(5,0) 3(10,0)
"PowerPair 3x3" [mm]
  rect 0.45x0.45 smd: 1(-0.975,-1.386) 2(-0.325,-1.386) 3(0.325,-1.386) 4(0.975,-1.386) 5(0.975,1.386) 6(0.325,1.386) 7(-0.325,1.386) 8(-0.975,1.386)
  rect 2.45x1.036 smd: 9(0,0.434)
  rect 2.45x0.562 smd: 10(0,-0.671)
  body extent -1.5,-1.5 1.5,1.5, height 0.75
"QFN4X4-16 - EPAD unconnected" [mm] "Quad Flat No Lead, Plastic; 16 Terminals; Body 4 x 4 mm; Pitch 0.65 mm"
  oval 1x0.37 smd: 1(-2.05,0.975) 2(-2.05,0.325) 3(-2.05,-0.325) 4(-2.05,-0.975) 9(2.05,-0.975) 10(2.05,-0.325) 11(2.05,0.325) 12(2.05,0.975)
  oval 0.37x1 smd: 5(-0.975,-2.05) 6(-0.325,-2.05) 7(0.325,-2.05) 8(0.975,-2.05) 13(0.975,2.05) 14(0.325,2.05) 15(-0.325,2.05) 16(-0.975,2.05)
  rect 2.7x2.7 smd paste-5: 17(0,0)
  silkscreen extent -2.62,-2.05 2.05,2.05, body extent -2,-2 2,2, height 0.92
"QFN-FCMOD (RKH) 9" [mm]
  rrect50% 0.8x0.4 smd paste-0.05 mask-0.05: 1(-1.85,1.9) 6(1.85,1.9)
  rrect50% 1.1x0.5 smd paste-0.05 mask-0.05: 2(-1.7,1.05) 5(1.7,1.05)
  rrect50% 0.475x0.4 smd paste-0.05 mask-0.05: 3(-2.013,-1.9) 3(-2.013,-1.25) 3(-2.013,-0.6) 3(-2.013,0.05) 4(2.013,-1.9) 4(2.013,-1.25) 4(2.013,-0.6) 4(2.013,0.05)
  rrect15% 1.6x2.35 smd paste-1.5 mask-1.168: 3(-1.45,-0.925) 4(1.45,-0.925)
  rrect30% 1.02x0.71 smd paste-0.05 mask-0.05: 3(-1.165,-1.735) 3(-1.165,-0.925) 3(-1.165,-0.115) 4(1.165,-1.735) 4(1.165,-0.925) 4(1.165,-0.115)
  rrect50% 0.4x0.8 smd paste-0.05 mask-0.05: 7(0.85,2.1) 9(-0.85,2.1)
  rrect25% 0.96x4.6 smd paste-1 mask-2.286: 8(0,0.2)
  rrect50% 0.5x1.1 smd paste-0.05 mask-0.05: 8(0,1.95)
  round 0.5 hole 0.203 mask-0.3: V(-1.7,1.05)
  Top Layer pour cut-out: -1.875,0.2 -1.875,-0.1 -1.856,-0.104 -1.84,-0.115 -1.829,-0.131 -1.825,-0.15 -1.825,-0.15 -1.825,-0.4 -1.829,-0.419 -1.84,-0.435 -1.856,-0.446 -1.875,-0.45 -1.875,-0.45 -1.875,-0.75 -1.856,-0.754 -1.84,-0.765 -1.829,-0.781 -1.825,-0.8 -1.825,-0.8 -1.825,-1.05 -1.829,-1.069 -1.84,-1.085 -1.856,-1.096 -1.875,-1.1 -1.875,-1.1 -1.875,-1.4 -1.856,-1.404 -1.84,-1.415 -1.829,-1.431 -1.825,-1.45 -1.825,-1.45 -1.825,-1.7 -1.829,-1.719 -1.84,-1.735 -1.856,-1.746 -1.875,-1.75 -1.875,-1.75 -1.875,-2.05 -0.75,-2.05 -0.731,-2.046 -0.715,-2.035 -0.704,-2.019 -0.7,-2 -0.7,-2 -0.7,0.125 -0.706,0.154 -0.722,0.178 -0.746,0.194 -0.775,0.2 -0.775,0.2 -0.775,0.2
  Top Layer pour cut-out: 1.875,0.2 1.875,-0.1 1.856,-0.104 1.84,-0.115 1.829,-0.131 1.825,-0.15 1.825,-0.15 1.825,-0.4 1.829,-0.419 1.84,-0.435 1.856,-0.446 1.875,-0.45 1.875,-0.45 1.875,-0.75 1.856,-0.754 1.84,-0.765 1.829,-0.781 1.825,-0.8 1.825,-0.8 1.825,-1.05 1.829,-1.069 1.84,-1.085 1.856,-1.096 1.875,-1.1 1.875,-1.1 1.875,-1.4 1.856,-1.404 1.84,-1.415 1.829,-1.431 1.825,-1.45 1.825,-1.45 1.825,-1.7 1.829,-1.719 1.84,-1.735 1.856,-1.746 1.875,-1.75 1.875,-1.75 1.875,-2.05 0.75,-2.05 0.731,-2.046 0.715,-2.035 0.704,-2.019 0.7,-2 0.7,-2 0.7,0.125 0.706,0.154 0.722,0.178 0.746,0.194 0.775,0.2 0.775,0.2 0.775,0.2
  Keep-Out Layer circle w0.001: c-0.8,0.625 r0.175
  Keep-Out Layer circle w0.001: c0.8,0.625 r0.175
  silkscreen extent -2.25,-2.5 2.25,2.5, body extent -2.03,-2.29 2.03,2.29, height 2.1
RESC1608X06L [mm] "Chip Resistor, Body 1.6x0.8mm, IPC High Density, EIA 0603"
  rect 0.7x0.9 smd: 1(-0.75,0) 2(0.75,0)
  silkscreen extent -0.01,-0.35 0.01,0.35, body extent -0.85,-0.48 0.85,0.48, height 0.6
RESC1608X06N [mm] "Chip Resistor, Body 1.6x0.8mm, IPC Medium Density, EIA 0603"
  rect 0.9x1 smd: 1(-0.85,0) 2(0.85,0)
  silkscreen extent -0.2,-0.4 0.2,0.4, body extent -0.85,-0.48 0.85,0.48, height 0.6
RTA0040B_NV [mm]
  oval 0.85x0.28 smd paste-0.025 mask+0.07: 1(-2.975,2.25) 2(-2.975,1.75) 3(-2.975,1.25) 4(-2.975,0.75) 5(-2.975,0.25) 6(-2.975,-0.25) 7(-2.975,-0.75) 8(-2.975,-1.25) 9(-2.975,-1.75) 10(-2.975,-2.25) 21(2.975,-2.25) 22(2.975,-1.75) 23(2.975,-1.25) 24(2.975,-0.75) 25(2.975,-0.25) 26(2.975,0.25) 27(2.975,0.75) 28(2.975,1.25) 29(2.975,1.75) 30(2.975,2.25)
  oval 0.28x0.85 smd paste-0.025 mask+0.07: 11(-2.25,-2.975) 12(-1.75,-2.975) 13(-1.25,-2.975) 14(-0.75,-2.975) 15(-0.25,-2.975) 16(0.25,-2.975) 17(0.75,-2.975) 18(1.25,-2.975) 19(1.75,-2.975) 20(2.25,-2.975) 31(2.25,2.975) 32(1.75,2.975) 33(1.25,2.975) 34(0.75,2.975) 35(0.25,2.975) 36(-0.25,2.975) 37(-0.75,2.975) 38(-1.25,2.975) 39(-1.75,2.975) 40(-2.25,2.975)
  rect 4.15x4.15 smd paste-2.08 mask+0: 41(0,0)
  Top Layer keep-out region: -2.918,2.535 -2.535,2.535 -2.535,2.918 -2.918,2.918
  silkscreen extent -3.27,-3.27 3.27,3.27, body extent -3,-3 3,3, height 1
"VQFN-HR (RUX) 12" [mm]
  rrect25% 1.05x0.4 smd paste+0 mask+0.05: 1(-0.675,0.35) 2(-0.675,-0.35) 7(0.675,-0.35) 8(0.675,0.35)
  rrect50% 0.2x0.6 smd paste+0 mask+0.05: 3(-0.75,-1.15) 4(-0.25,-1.15) 5(0.25,-1.15) 6(0.75,-1.15) 9(0.75,1.15) 10(0.25,1.15) 11(-0.25,1.15) 12(-0.75,1.15)
  silkscreen extent -1.25,-1.5 1.25,1.5, body extent -1.05,-1.3 1.05,1.3, height 1
WLCSP9 [mm]
  round 0.215 smd mask+0.05: A1(0,0) A2(0.4,0) A3(0.8,0) B1(0,-0.4) B2(0.4,-0.4) B3(0.8,-0.4) C1(0,-0.8) C2(0.4,-0.8) C3(0.8,-0.8)
  silkscreen extent -0.35,0.3 -0.35,0.3, body extent -0.23,-1.01 1.02,0.2, height 0.58
"WLCSP9 - ti" [mm]
  round 0.23 smd mask+0.04: A1(0,0) A2(0.4,0) A3(0.8,0) B1(0,-0.4) B2(0.4,-0.4) C1(0,-0.8) C2(0.4,-0.8) C3(0.8,-0.8)
  round 0.23 smd paste+0 mask+0.04: B3(0.8,-0.4)
  silkscreen extent -0.45,0.42 -0.45,0.43, body extent -0.3,-1.1 1.1,0.3, height 0.63

## Part data
C1 C2 C3 C4 C5 C6 C7 C11 C13 C14 C15 C16_1 C16_2 C16_3 C16_4 C17_1 C17_2 C17_3 C17_4 C18_1 C18_2 C18_3 C18_4 C19_1 C19_2 C19_3 C19_4 C23_1 C23_2 C23_3 C23_4 C24 C25 C26 C27 C28 C29 C30 C31: library part "TBD Capacitor[[/\]]0603[[/\]]1", "Capacitor TBD 0603", Currentie=CHF, DateLastUpdate="2012-11-19 / 14:36:40", Footprint Acort=0603_G, Preference=1, ROHS=True, Size=0603
C8 C9 C10 C12 C20_1 C20_2 C20_3 C20_4 C21_1 C21_2 C21_3 C21_4 C22_1 C22_2 C22_3 C22_4: library part "TBD Capacitor[[/\]]1206[[/\]]1", "Capacitor TBD 1206", Currentie=CHF, DateLastUpdate="2012-11-19 / 14:37:26", Footprint Acort=1206, Preference=1, ROHS=True, Size=1206
D1 D2 D3: "QuasarBrite LED RGB (Full color 0404 SMD LED), 3x 2mA", Currentie=CHF, Manufacturer=Lumex, Supplier Part Number 1=696-LX0404SIUPGUSB, ComponentLink1Description="Manufacturer link", ComponentLink1URL=http://www.lumex.com/en/products/detail/leds7/surface_mount4/0404_package/, ComponentLink2Description="Supplier link", ComponentLink2URL=http://www.mouser.ch/ProductDetail/Lumex/SML-LX0404SIUPGUSB/?qs=%2fha2pyFaduhVJD5ZRhDg%2ft7CXH9HmwqzW0VFa3tCuDCfVLKu7L8ofw8YssAqq7i9, DateLastUpdate="2015-06-26 / 09:49:20", Footprint Acort=ToDefine, Manufacturer Nr=SML-LX0404SIUPGUSB, Preference=1, ROHS=True, Size=0404, Supplier 1=Mouser
D5 D6 D7 D8: "Schottky Diodes & Rectifiers 203 Package Schottky Diodes", Average Rectified Current=30mA, Case/Package=0201, Case Code (Metric)=0603, Forward Current=200mA, Manufacturer=MCC, Max Operating Temperature=125°C, Max Power Dissipation=100mW, Max Repetitive Reverse Voltage (Vrrm)=40V, Package Quantity=10000, Peak Reverse Current=500nA, Reverse Voltage (DC)=28V, Supplier Part Number 1=RB751S-40DP-TPMSCT-ND, Case Code (Imperial)=0201, Element Configuration=Single, Height=0.34mm, Length=0.67mm, Manufacturer Part Number=RB751S-40DP-TP, Max Forward Surge Current (Ifsm)=200mA, Max Reverse Voltage (DC)=40V, Mount="Surface Mount", Packaging="Tape and Reel", Pricing 1="1=0.3, 10=0.27, 100=0.1514, 500=0.08112, 1000=0.05516 (USD)", Stock 1=104704, Supplier 1=Digi-Key, Termination=SMD/SMT, Width=0.37mm
D9 D10: "DIODE ZENER 5.1V 250MW 2DFN", Case/Package=DFN, Manufacturer=Diodes, Max Operating Temperature=150°C, Max Power Dissipation=250mW, Max Reverse Leakage Current=200nA, Min Operating Temperature=-55°C, Package Quantity=10000, Supplier Part Number 1=GDZ5V1LP3-7DICT-ND, Tolerance=5%, Zener Voltage=5.1V, ComponentLink1Description=https://www.diodes.com/assets/Datasheets/GDZxVxLP3.pdf, ComponentLink1URL=https://www.diodes.com/assets/Datasheets/GDZxVxLP3.pdf, Element Configuration=Single, Height=0.3mm, Length=0.62mm, Manufacturer Part Number=GDZ5V1LP3-7, Mount="Surface Mount", Number of Pins=2, Packaging="Tape and Reel", Peak Reverse Current=200nA, Power Rating=250mW, Pricing 1="1=0.37, 10=0.303, 100=0.1607, 500=0.1057, 1000=0.07188 (USD)", Radiation Hardening=No, REACH SVHC="No SVHC", Stock 1=50190, Supplier 1=Digi-Key, Voltage Tolerance=5%, Width=0.32mm, Zener Current=200nA
J1 J2 J3 J4: "Micro Solder Jumper 3 leads", DateLastUpdate="2008-02-26 / 09:57:0", Footprint Acort=ToDefine, Preference=1
J5_1 J5_2 J5_3 J5_4 J6_1 J6_2 J6_3 J6_4 J7_1 J7_2 J7_3 J7_4: "Medium Solder Jumper 2 leads", DateLastUpdate="2007-11-06 / 20:24:14", Footprint Acort=ToDefine, Preference=1
P10: "USB Shielded I/O Receptacle; Type C; Right Angle; Surface Mount; Gold over Nickel", Manufacturer=Molex, Supplier Part Number 1=WM17992CT-ND, Manufacturer Part Number=201267-0005, Pricing 1="1=2.77, 10=2.531, 25=2.3876, 50=2.292, 100=2.1965, 250=2.00552, 500=1.86228 (USD)", Stock 1=7138, Supplier 1=Digi-Key
P11: "2-Pin", Manufacturer="Generic Components", Class I=Connector, Publisher="Altium Limited", Revision="July-2002: Re-released for DXP Platform."
P13: "Header, 3-Pin", Manufacturer="Generic Components", Class I=Connector, Publisher="Altium Limited", Revision="July-2002: Re-released for DXP Platform."
P16 P17 P18 P19: "3-Pin", Manufacturer="Generic Components", Class I=Connector, Publisher="Altium Limited", Revision="July-2002: Re-released for DXP Platform."
R1 R2 R3 R4 R5 R6 R7 R8 R9 R10 R11 R12 R13 R14 R15 R16 R17 R18 R19 R20_1 R20_2 R20_3 R20_4 R21_1 R21_2 R21_3 R21_4 R22_1 R22_2 R22_3 R22_4 R23_1 R23_2 R23_3 R23_4 R24_1 R24_2 R24_3 R24_4 R25_1 R25_2 R25_3 R25_4 R26_1 R26_2 R26_3 R26_4 R27_1 R27_2 R27_3 R27_4 R28_1 R28_2 R28_3 R28_4 R29_1 R29_2 R29_3 R29_4 R30_1 R30_2 R30_3 R30_4 R31_1 R31_2 R31_3 R31_4 R32 R33 R34 R35 R36 R37 R38 R39 R40: library part TBD[[/\]]0603[[/\]]1, "Resistor ToDo 0603", Currentie=CHF, DateLastUpdate="2012-11-19 / 14:13:33", Footprint Acort=0603, Preference=1, ROHS=True, Size=0603
SW1 SW2: "KMR221GLFS", Contact Rating @ Voltage="0.05A @ 32VDC", Currentie=CHF, Illumination Type, Color=-, Manufacturer=Tyco, Manufacturer Nr=7-188275-6, Operating Force=200gf, Operating Temperature="-40°C ~ 85°C", Supplier Part Number 1=401-1427-1-ND, Actuator Height off PCB, from Pins=1.90mm, Actuator Material=-, Actuator Orientation="Top Actuated", Actuator Type=Standard, Category=Switches, Circuit=SPST-NO, ComponentLink1Description=Datasheet, ComponentLink1URL=http://ecommas.tycoelectronics.com/commerce/DocumentDelivery/DDEController?Action=showdoc&DocId=Customer+Drawing%7F188275%7FR%7Fpdf%7FEnglish%7FC_188275_R.pdf, ComponentLink2Description="Farnell link", ComponentLink2URL=http://fr.farnell.com/jsp/displayProduct.jsp?sku=1056234, ComponentLink3Description=http://www.ck-components.com/index.php?module=media&action=Display&cmpref=14414&lang=en&width=&height=&format=&alt=, ComponentLink3URL=http://www.ck-components.com/index.php?module=media&action=Display&cmpref=14414&lang=en&width=&height=&format=&alt=, DateLastUpdate="2007-12-04 / 09:15:57", Features="Grounding Pin", Footprint Acort=ToDefine, Illumination=Non-Illuminated, Illumination Voltage (Nominal)=-, Ingress Protection=-, Manufacturer Part Number=KMR221GLFS, Mechanical Life="200,000 Cycles", Mounting Type="Surface Mount", Orientation=Vertical, Outline="4.60mm x 2.80mm", Packaging="Cut Tape (CT)", Preference=1, Price_1=1,1, Price_2=0,924, Pricing 1="1=0.51, 10=0.493, 25=0.484, 50=0.4656, 100=0.4017, 250=0.3652, 500=0.34694, 1000=0.2739 (USD)", Quant_1=10, Quant_2=900, ROHS=True, Stock 1=20549, Supplier=Farnell, Supplier 1=Digi-Key, Supplier Nr=1056234, Switch Function=Off-Mom, Switch Travel=0.25mm, Termination Style="Gull Wing", Type=SMD
T1: "DUAL N-CHANNEL 30V", Continuous Drain Current (ID)=590mA, Drain to Source Voltage (Vdss)=30V, Input Capacitance=30.3pF, Manufacturer="NXP Semiconductors", Max Operating Temperature=150°C, Max Power Dissipation=285mW, Min Operating Temperature=-55°C, Supplier Part Number 1=1727-2277-1-ND, FET Type="2 N-Channel", Manufacturer Part Number=PMDXB550UNEZ, Mount="Surface Mount", Packaging="Tape and Reel", Pricing 1="1=0.48, 10=0.379, 100=0.2601, 500=0.17838, 1000=0.13379 (USD)", Rds On Max=670mR, Stock 1=5582, Supplier 1=Digi-Key
T2_1 T2_2 T2_3 T2_4 T3_1 T3_2 T3_3 T3_4 T4_1 T4_2 T4_3 T4_4: Manufacturer="Vishay Siliconix", Supplier Part Number 1=SIZ322DT-T1-GE3TR-ND, Manufacturer Part Number=SIZ322DT-T1-GE3, Pricing 1="3000=0.37036 (USD)", Stock 1=0, Supplier 1=Digi-Key
U1: "IC OVERVOLTAGE PROT CTRL 9DSBGA", Manufacturer="Texas Instruments", Max Operating Temperature=85°C, Min Operating Temperature=-40°C, Supplier Part Number 1=296-50034-1-ND, Interface=USB, Manufacturer Part Number=TPD2S300YFFR, Pricing 1="1=1.22, 10=1.094, 100=0.8532, 500=0.70482, 1000=0.55643 (USD)", Stock 1=1190, Supplier 1=Digi-Key
U2: "USB Type-C Port Controller 9-Pin WLCSP T/R", Manufacturer="ON Semiconductor / Fairchild", Max Operating Temperature=85°C, Min Operating Temperature=-40°C, Operating Supply Current=25uA, Supplier Part Number 1=FUSB302UCXCT-ND, Contact Plating=Copper,Silver,Tin, Interface=USB, Lead Free="Lead Free", Manufacturer Part Number=FUSB302UCX, Mount="Surface Mount", Number of Pins=9, Packaging="Tape and Reel", Stock 1=0, Supplier 1=Digi-Key, Weight=0.0373333g
U3: "Power Mux Dual Input One Output", Manufacturer="Texas Instruments", PartNumber=TPS2121RUXR, RefDes=RefDes, Type=DEV
U4: "DC DC CONVERTER 1.2-6V 15W", Current - Output (Max)=2.5A, Manufacturer="Texas Instruments", Operating Temperature="-40°C ~ 85°C (With Derating)", Package / Case=9-PowerQFN, Supplier Device Package="9-QFN-FCMOD (4.5x4)", Voltage - Input (Max)=28V, Voltage - Input (Min)=4.5V, Voltage - Output 1="1.2 ~ 6 V", Voltage - Output 2=-, Applications="ITE (Commercial)", Category="Power Supplies - Board Mount", ComponentLink1Description=http://www.ti.com/lit/ds/symlink/tpsm84209.pdf, ComponentLink1URL=http://www.ti.com/lit/ds/symlink/tpsm84209.pdf, Efficiency=86.5%, Features="OCP, OTP, UVLO", Manufacturer Part Number=TPSM84209RKHT, Mounting Type="Surface Mount", Packaging="Cut Tape (CT)", Part Status=Active, Pricing 1="1=5.04, 10=4.53, 100=3.7117 (USD)", ROHS="Request Inventory Verification", Size / Dimension="0.18\" L x 0.16\" W x 0.08\" H (4.5mm x 4.0mm x 2.1mm)", Stock 1=47, Supplier 1=Digi-Key, Type="Non-Isolated PoL Module", Voltage - Output 3=-, Voltage - Output 4=-
U5 U6 U7: "Hall Effect Linear Current Sensor with Overcurrent Fault Output for <100 V Isolation Applications, 3 to 5.5 V, -31 to 31 A IP, -40 to 125 degC, 12-Pin QFN (EX), RoHS, Tape and Reel", Temperature Max="125 degC", Temperature Min="-40 degC", -3dB Bandwidth="0.1 MHz", ComponentLink1Description="Manufacturer URL", ComponentLink1URL=http://www.allegromicro.com/, ComponentLink2Description=Datasheet, ComponentLink2URL=http://www.allegromicro.com/~/media/Files/Datasheets/ACS711-Datasheet.ashx?la=en, ComponentLink3Description="Package Specification", ComponentLink3URL=http://www.allegromicro.com/~/media/Files/Datasheets/ACS711-Datasheet.ashx?la=en, DatasheetVersion="Rev. 4", IP Max=31A, IP Min="-31 A", Mounting Technology="Surface Mount", PackageDescription="12-Pin Quad Flat No-Lead, Body 3 x 3 mm, Height 0.8 mm", Packing="Tape and Reel", PartNumber=ACS711KEXLT-31AB-T, ROHS=TRUE, VCC Max="5.5 V", VCC Min="3 V"
U8_1 U8_2 U8_3 U8_4: "6 to 60-V Three-Phase Smart Gate Driver, 3 current sense amplifiers, SPI interface, 6 x 6 × 0.75 mm QFN", Manufacturer="Texas Instruments", PartNumber=DRV8323HRTAR, RefDes=RefDes, Type=DEV
U9 U10 U11 U12: "IC ENCODER ROTARY 12BIT 16QFN", Manufacturer=ams, Supplier Part Number 1=AS5055A-BQFMCT-ND, Température d’utilisation="-40°C ~ 85°C", Alimentation en tension="3 V ~ 3,6 V", Angle de rotation - Électrique, mécanique="0° ~ 360°, Modes continue", Category="Capteurs, transducteurs", ComponentLink1Description=http://ams.com/eng/content/download/552323/1541717/300455, ComponentLink1URL=http://ams.com/eng/content/download/552323/1541717/300455, Linéarité=±1,41°, Manufacturer Part Number=AS5055A-BQFM, Plage linéaire=-, Pour la mesure=Angle, Pricing 1="1=6.54, 10=5.885, 25=5.362, 100=4.8388, 250=4.44644 (EUR)", ROHS="RoHS Compliant", Résistance (Ohms)=-, Signal de sortie=-, Sortie=SPI, Statut de la pièce=Actif, Stock 1=6192, Style de terminaison="Languette CMS (SMT)", Supplier 1=Digi-Key, Supplier 2=RSComponents, Supplier Part Number 2=423478, Technologie="Effet Hall", Tolérance de résistance=-, Type de montage="Montage en surface", Type d’actionneur="Aimant externe, non inclus"
P1 P2 P3 P4 P5 P6 P7 P8 P9 P12: LatestRevisionDate=17-Jul-2002, LatestRevisionNote="Re-released for DXP Platform.", Publisher="Altium Limited"

## Via types
v1: diameter 0.5, hole 0.3, Top Layer to Bottom Layer, 126 vias
v2: diameter 0.5, hole 0.2, Top Layer to Bottom Layer, tented both sides, 11 vias
v3: diameter 0.4, hole 0.2, Top Layer to Bottom Layer, tented both sides, 10 vias

## Nets (pads, with @x,y where several pads share a name; then routed paths per layer and width w, separated by ;. In a path a pad name is that pad's centre, name@x,y a point inside that pad or via, vN(x,y) a via of type N, cw(c..) or ccw(c..) an arc to the next point about the centre after c; other vN are vias at no path point)
3.3V: C2.1 C5.1 C6.1 C7.1 C13.1 C14.1 C15.1 C23_1.1 C23_2.1 C23_3.1 C23_4.1 C25.1 C27.1 C29.1 C31.1 D1.1 D2.1 D3.1 P14.16 R10.1 R11.1 R14.1 R15.1 R32.1 R34.1 R35.1 R37.1 R39.1 SW2.2 U1.C2 U1.C3 U2.A3 U4.3 U5.12 U6.12 U7.12 U8_1.24 U8_2.24 U8_3.24 U8_4.24 U9.11 U9.14 U10.11 U10.14 U11.11 U11.14 U12.11 U12.14
  other v2: 258.02,35.425 258.84,35.67 258.02,36.075 258.84,36.48 258.02,36.725
/CS_ENCODERS_1: P14.41 R34.2 U9.4 U10.4 U11.4 U12.4
/INT_ENCODERS_1: P14.40 U9.15
/INT_PD_CTRL_1: P14.70 U2.B2
/PWR_ON_BTN_STATE_1: D7.2 P15.52
ADCs_motor.Phase1_1: P1.2 P4.2 P7.2 P15.24
ADCs_motor.Phase2_1: P2.2 P5.2 P8.2 P15.34
ADCs_motor.Phase3_1: P3.2 P6.2 P9.2 P15.6
ADCs_MOTOR_1.Phase1_1: U8_1.23
ADCs_MOTOR_1.Phase2_1: U8_1.22
ADCs_MOTOR_1.Phase3_1: U8_1.21
ADCs_MOTOR_2.Phase1_1: P1.1 U8_2.23
ADCs_MOTOR_2.Phase2_1: P2.1 U8_2.22
ADCs_MOTOR_2.Phase3_1: P3.1 U8_2.21
ADCs_MOTOR_3.Phase1_1: P4.1 U8_3.23
ADCs_MOTOR_3.Phase2_1: P5.1 U8_3.22
ADCs_MOTOR_3.Phase3_1: P6.1 U8_3.21
ADCs_MOTOR_4.Phase1_1: P7.1 U8_4.23
ADCs_MOTOR_4.Phase2_1: P8.1 U8_4.22
ADCs_MOTOR_4.Phase3_1: P9.1 U8_4.21
BAT+: C12.1 C16_1.1 C16_2.1 C16_3.1 C16_4.1 C17_1.1 C17_2.1 C17_3.1 C17_4.1 C20_1.1 C20_2.1 C20_3.1 C20_4.1 C21_1.1 C21_2.1 C21_3.1 C21_4.1 C22_1.1 C22_2.1 C22_3.1 C22_4.1 D5.2 P11.1 T2_1.2 T2_1.3 T2_1.4 T2_1.10 T2_2.2 T2_2.3 T2_2.4 T2_2.10 T2_3.2 T2_3.3 T2_3.4 T2_3.10 T2_4.2 T2_4.3 T2_4.4 T2_4.10 T3_1.2 T3_1.3 T3_1.4 T3_1.10 T3_2.2 T3_2.3 T3_2.4 T3_2.10 T3_3.2 T3_3.3 T3_3.4 T3_3.10 T3_4.2 T3_4.3 T3_4.4 T3_4.10 T4_1.2 T4_1.3 T4_1.4 T4_1.10 T4_2.2 T4_2.3 T4_2.4 T4_2.10 T4_3.2 T4_3.3 T4_3.4 T4_3.10 T4_4.2 T4_4.3 T4_4.4 T4_4.10 U3.2 U8_1.4 U8_1.5 U8_2.4 U8_2.5 U8_3.4 U8_3.5 U8_4.4 U8_4.5
  other v1: 273,32 274,32 275,32 273,33 274,33 275,33 273,34 274,34 275,34
  other v3: 253.6,37.65
C_CC1_3: P10.A5 U1.A1
C_CC2_3: P10.B5 U1.A3
C_PP_SENSE_4: P12.1 R17.1 U3.10
CC1_3: C3.1 U1.B1 U2.C1
CC2_3: C4.1 U1.B3 U2.A1
GND: C1.2 C2.2 C3.2 C4.2 C6.2 C7.2 C8.2 C9.2 C10.2 C11.2 C12.2 C13.2 C14.2 C15.2 C16_1.2 C16_2.2 C16_3.2 C16_4.2 C19_1.2 C19_2.2 C19_3.2 C19_4.2 C20_1.2 C20_2.2 C20_3.2 C20_4.2 C21_1.2 C21_2.2 C21_3.2 C21_4.2 C22_1.2 C22_2.2 C22_3.2 C22_4.2 C23_1.2 C23_2.2 C23_3.2 C23_4.2 C24.2 C25.2 C26.2 C27.2 C28.2 C29.2 C30.2 C31.2 D4.2 D9.2 D10.2 P10.A1 P10.A12 P10.B1 P10.B12 P10.SHIELD P11.2 P13.2 P14.8 P14.19 P14.20 P14.22 P14.49 P14.60 P14.71 P14.72 P15.9 P15.20 P15.32 P15.39 P15.54 P15.63 P15.71 P15.72 P20.SHIELD P21.SHIELD P22.SHIELD P23.SHIELD P24.SHIELD P25.SHIELD P26.SHIELD P27.SHIELD R16.2 R17.2 R18.2 R19.2 R26_1.2 R26_2.2 R26_3.2 R26_4.2 R27_1.2 R27_2.2 R27_3.2 R27_4.2 R28_1.2 R28_2.2 R28_3.2 R28_4.2 R29_1.2 R29_2.2 R29_3.2 R29_4.2 R30_1.2 R30_2.2 R30_3.2 R30_4.2 R31_1.2 R31_2.2 R31_3.2 R31_4.2 R33.1 R36.1 R38.1 R40.1 SW1.1 SW1.Shield T1.1 T1.4 U1.B2 U2.C2 U3.3 U3.12 U4.8 U5.5 U6.5 U7.5 U8_1.10 U8_1.11 U8_1.20 U8_1.41 U8_2.10 U8_2.11 U8_2.20 U8_2.41 U8_3.10 U8_3.11 U8_3.20 U8_3.41 U8_4.10 U8_4.11 U8_4.20 U8_4.41 U9.9 U9.13 U10.9 U10.13 U11.9 U11.13 U12.9 U12.10 U12.13
  other v1: 273,37 274,37 275,37 273,38 274,38 275,38 273,39 274,39 275,39
  other v2: 260,35.23 260,36.23 260,37.23 260,38.23 260,39.23
I2C_PD_CTRL.SCL_1: P14.51 R11.2 U2.B3
I2C_PD_CTRL.SDA_1: P14.53 R10.2 U2.C3
MOTOR_1.Phase1_1: R23_1.1 T2_1.9 U7.1 U7.2 U8_1.7
  other v3: 303.15,131.5
MOTOR_1.Phase2_1: R24_1.1 T3_1.9 U6.1 U6.2 U8_1.14
  other v3: 294.15,131.5
MOTOR_1.Phase3_1: R25_1.1 T4_1.9 U5.1 U5.2 U8_1.17
  other v3: 286.15,131.5
MOTOR_2.Phase1_1: P16.1 P21.1 P24.6 P24.7 R23_2.1 T2_2.9 U8_2.7
  other v1: 239,123 240,123 241,123 239,124 240,124 241,124 239,125 240,125 241,125
MOTOR_2.Phase2_1: P16.2 P21.2 P24.8 P24.9 R24_2.1 T3_2.9 U8_2.14
  other v1: 239,128 240,128 241,128 239,129 240,129 241,129 239,130 240,130 241,130
MOTOR_2.Phase3_1: P16.3 P21.3 P24.10 P24.11 R25_2.1 T4_2.9 U8_2.17
  other v1: 239,133 240,133 241,133 239,134 240,134 241,134 239,135 240,135 241,135
MOTOR_3.Phase1_1: P17.1 P22.1 P25.6 P25.7 R23_3.1 T2_3.9 U8_3.7
  other v1: 245,123 246,123 247,123 245,124 246,124 247,124 245,125 246,125 247,125
MOTOR_3.Phase2_1: P17.2 P22.2 P25.8 P25.9 R24_3.1 T3_3.9 U8_3.14
  other v1: 245,128 246,128 247,128 245,129 246,129 247,129 245,130 246,130 247,130
MOTOR_3.Phase3_1: P17.3 P22.3 P25.10 P25.11 R25_3.1 T4_3.9 U8_3.17
  other v1: 245,133 246,133 247,133 245,134 246,134 247,134 245,135 246,135 247,135
MOTOR_4.Phase1_1: P18.1 P23.1 P26.6 P26.7 R23_4.1 T2_4.9 U8_4.7
  other v1: 250,123 251,123 252,123 250,124 251,124 252,124 250,125 251,125 252,125
MOTOR_4.Phase2_1: P18.2 P23.2 P26.8 P26.9 R24_4.1 T3_4.9 U8_4.14
  other v1: 250,128 251,128 252,128 250,129 251,129 252,129 250,130 251,130 252,130
MOTOR_4.Phase3_1: P18.3 P23.3 P26.10 P26.11 R25_4.1 T4_4.9 U8_4.17
  other v1: 250,133 251,133 252,133 250,134 251,134 252,134 250,135 251,135 252,135
MOTOR_CTRL_1./CS_SPI_1: P14.39 U8_1.29
MOTOR_CTRL_1./FAULT_1: P15.59 U8_1.25
MOTOR_CTRL_1.ENABLE_1: P15.16 U8_1.30
MOTOR_CTRL_1.Neutral_sense_1: J1.1 R20_1.2 R21_1.2 R22_1.2
MOTOR_CTRL_1.Phase1_1_N: P15.30 U8_1.35
MOTOR_CTRL_1.Phase1_1_P: P15.23 U8_1.34
MOTOR_CTRL_1.Phase1_sense_1: P14.28 R22_1.1 R23_1.2 R28_1.1
MOTOR_CTRL_1.Phase2_1_N: P15.47 U8_1.37
MOTOR_CTRL_1.Phase2_1_P: P15.56 U8_1.36
MOTOR_CTRL_1.Phase2_sense_1: P14.30 R21_1.1 R24_1.2 R27_1.1
MOTOR_CTRL_1.Phase3_1_N: P15.49 U8_1.39
MOTOR_CTRL_1.Phase3_1_P: P15.33 U8_1.38
MOTOR_CTRL_1.Phase3_sense_1: P15.35 R20_1.1 R25_1.2 R26_1.1
MOTOR_CTRL_1.SPI.MISO_1: P14.2 R40.2 U8_1.26 U8_2.26 U8_3.26 U8_4.26 U12.2
MOTOR_CTRL_1.SPI.MOSI_1: P14.43 U8_1.27 U8_2.27 U8_3.27 U8_4.27 U9.1
MOTOR_CTRL_1.SPI.SCK_1: P14.1 U8_1.28 U8_2.28 U8_3.28 U8_4.28 U9.3 U10.3 U11.3 U12.3
MOTOR_CTRL_2./CS_SPI_1: P14.45 U8_2.29
MOTOR_CTRL_2./FAULT_1: P15.57 U8_2.25
MOTOR_CTRL_2.ENABLE_1: P15.55 U8_2.30
MOTOR_CTRL_2.Neutral_sense_1: J2.1 R20_2.2 R21_2.2 R22_2.2
MOTOR_CTRL_2.Phase1_1_N: P15.31 U8_2.35
MOTOR_CTRL_2.Phase1_1_P: P14.17 U8_2.34
MOTOR_CTRL_2.Phase1_sense_1: P14.9 R22_2.1 R23_2.2 R28_2.1
MOTOR_CTRL_2.Phase2_1_N: P15.18 U8_2.37
MOTOR_CTRL_2.Phase2_1_P: P15.25 U8_2.36
MOTOR_CTRL_2.Phase2_sense_1: P14.11 R21_2.1 R24_2.2 R27_2.1
MOTOR_CTRL_2.Phase3_1_N: P15.29 U8_2.39
MOTOR_CTRL_2.Phase3_1_P: P15.27 U8_2.38
MOTOR_CTRL_2.Phase3_sense_1: P14.54 R20_2.1 R25_2.2 R26_2.1
MOTOR_CTRL_3./CS_SPI_1: P15.65 U8_3.29
MOTOR_CTRL_3./FAULT_1: P15.50 U8_3.25
MOTOR_CTRL_3.ENABLE_1: P15.51 U8_3.30
MOTOR_CTRL_3.Neutral_sense_1: J3.1 R20_3.2 R21_3.2 R22_3.2
MOTOR_CTRL_3.Phase1_1_N: P15.1 U8_3.35
MOTOR_CTRL_3.Phase1_1_P: P14.34 U8_3.34
MOTOR_CTRL_3.Phase1_sense_1: P15.42 R22_3.1 R23_3.2 R28_3.1
MOTOR_CTRL_3.Phase2_1_N: P15.41 U8_3.37
MOTOR_CTRL_3.Phase2_1_P: P15.43 U8_3.36
MOTOR_CTRL_3.Phase2_sense_1: P15.58 R21_3.1 R24_3.2 R27_3.1
MOTOR_CTRL_3.Phase3_1_N: P15.5 U8_3.39
MOTOR_CTRL_3.Phase3_1_P: P15.46 U8_3.38
MOTOR_CTRL_3.Phase3_sense_1: P14.38 R20_3.1 R25_3.2 R26_3.1
MOTOR_CTRL_4./CS_SPI_1: P15.45 U8_4.29
MOTOR_CTRL_4./FAULT_1: P15.60 U8_4.25
MOTOR_CTRL_4.ENABLE_1: P15.53 U8_4.30
MOTOR_CTRL_4.Neutral_sense_1: J4.1 R20_4.2 R21_4.2 R22_4.2
MOTOR_CTRL_4.Phase1_1_N: P15.15 U8_4.35
MOTOR_CTRL_4.Phase1_1_P: P15.4 U8_4.34
MOTOR_CTRL_4.Phase1_sense_1: P14.35 R22_4.1 R23_4.2 R28_4.1
MOTOR_CTRL_4.Phase2_1_N: P15.28 U8_4.37
MOTOR_CTRL_4.Phase2_1_P: P15.19 U8_4.36
MOTOR_CTRL_4.Phase2_sense_1: P14.37 R21_4.1 R24_4.2 R27_4.1
MOTOR_CTRL_4.Phase3_1_N: P15.26 U8_4.39
MOTOR_CTRL_4.Phase3_1_P: P15.2 U8_4.38
MOTOR_CTRL_4.Phase3_sense_1: P15.38 R20_4.1 R25_4.2 R26_4.1
NetC1_1: C1.1 U1.A2
NetC5_2: C5.2 R15.2 R16.1 U4.1
NetC8_1: C8.1 C9.1 C10.1 U3.1 U3.8 U4.2
  other v2: 258.3,38.05
  other v3: 253.6,38.35 254.4,38.35
NetC11_1: C11.1 U3.11
NetC17_1_2: C17_1.2 U8_1.3
NetC17_2_2: C17_2.2 U8_2.3
NetC17_3_2: C17_3.2 U8_3.3
NetC17_4_2: C17_4.2 U8_4.3
NetC18_1_1: C18_1.1 U8_1.2
NetC18_1_2: C18_1.2 U8_1.1
NetC18_2_1: C18_2.1 U8_2.2
NetC18_2_2: C18_2.2 U8_2.1
NetC18_3_1: C18_3.1 U8_3.2
NetC18_3_2: C18_3.2 U8_3.1
NetC18_4_1: C18_4.1 U8_4.2
NetC18_4_2: C18_4.2 U8_4.1
NetC19_1_1: C19_1.1 U8_1.33
NetC19_2_1: C19_2.1 U8_2.33
NetC19_3_1: C19_3.1 U8_3.33